# Altium PCB SiPM_Array_v3.1.PcbDoc
Units mil, origin at the board's own origin, x right, y up, seen from the top; angles counter-clockwise.
Board outline 6000 x 4000 mil, 2 copper layers (Top Layer, Bottom Layer); 7 components, 7 nets, 68 pads, 3 vias.
Unrouted connection lines stored in the file: 35.
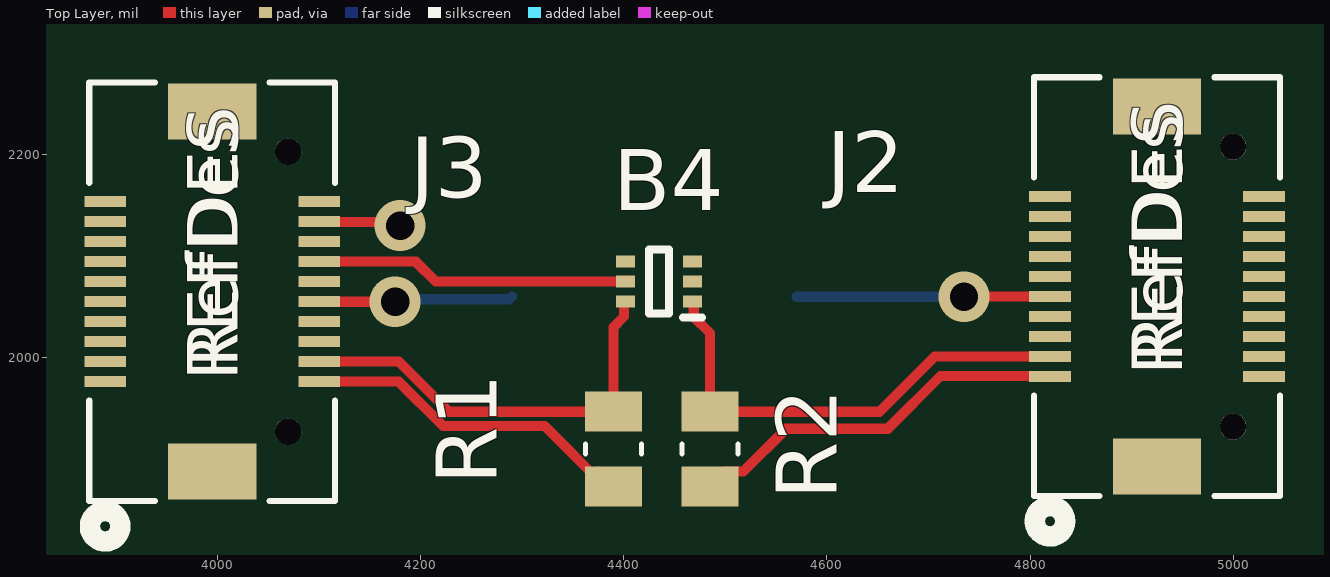
[diagram p0: Top Layer view]
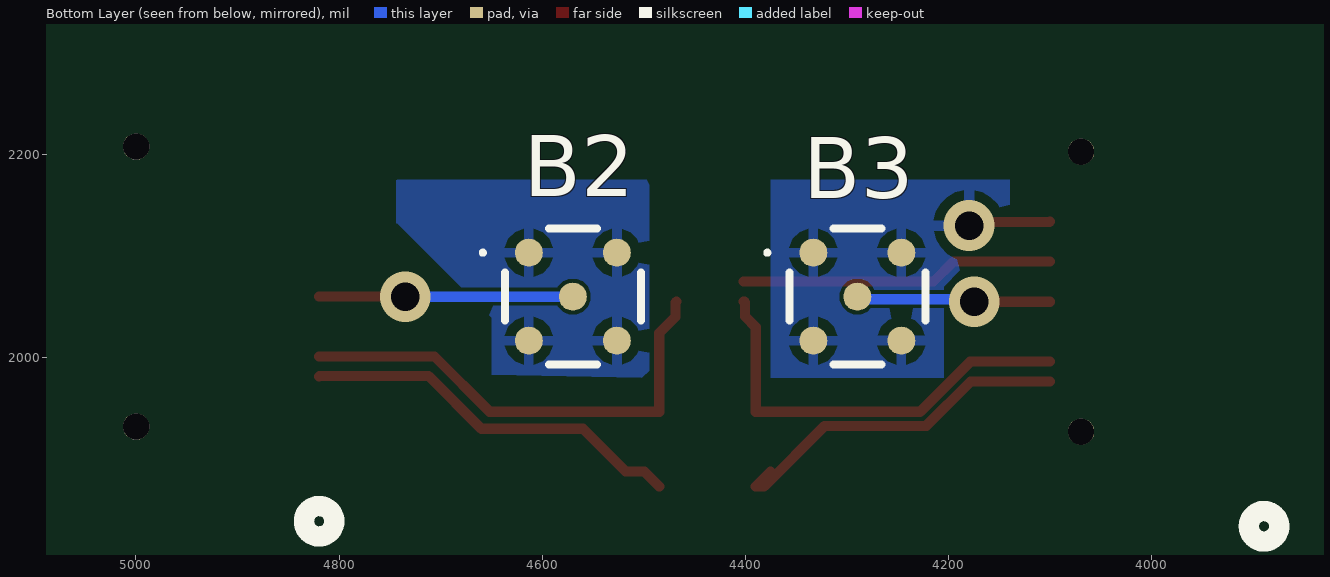
[diagram p1: Bottom Layer view, seen from below]

## Layer stack, top to bottom
Top Solder: solder mask 0.4, Solder Resist, Dk 3.5
Top Layer: signal copper 1.4
Dielectric 1: dielectric 12.6, FR-4, Dk 4.8
Bottom Layer: signal copper 1.4
Bottom Solder: solder mask 0.4, Solder Resist, Dk 3.5

## Board outline
1000,1000 7000,1000 7000,5000 1000,5000

## Design rules (kind name [scope] priority, off if disabled: settings)
Clearance [All] p1: gap=3.94 ignorepadtopadclearanceinfootprint=FALSE
PolygonConnect [All] p1: connectstyle=Relief reliefconductorwidth=10 reliefentries=4 polygonreliefangle="90 Angle" airgapwidth=10
RoutingVias [All] p1: holewidth=28 width=50 viastyle="Through Hole" minholewidth=28 minwidth=50 maxholewidth=28 maxwidth=50
SolderMaskExpansion [All] p1: expansion=4 istentingtop=FALSE
SupplyNets "Schematic Supply Nets_7" [InNet('SCL')] p1: voltage=0.000
SupplyNets "Schematic Supply Nets_6" [InNet('SDA')] p2: voltage=0.000
SupplyNets "Schematic Supply Nets_5" [InNet('VBR')] p3: voltage=0.000
SupplyNets "Schematic Supply Nets_4" [InNet('GND')] p4: voltage=0.000
SupplyNets "Schematic Supply Nets_3" [InNet('VAN1')] p5: voltage=0.000
SupplyNets "Schematic Supply Nets_2" [InNet('3V3')] p6: voltage=0.000
SupplyNets "Schematic Supply Nets_1" [InNet('VAN2')] p7: voltage=0.000
Width [All] p1: maxlimit=10 minlimit=10 preferedwidth=10
30 further rules are at their usual default settings.

## Components (designator, comment, footprint, x,y, rotation, side; value= is the part's Value field where it differs from the comment)
B2 "S14160-3050HS" S141603050HS 4570,2060 r180 bottom
B3 "S14160-3050HS" S141603050HS 4290,2060 r180 bottom
B4 "TMP112AQDRLRQ1" SOTFL50P160X60-6N 4435,2075 r180 top
J2 "DF17(3.0)-20DS-0.5V(57)" CONN_DF173.0-20DS-0.5V57_HIR 4925,2070 r90 top
J3 "DF17(3.0)-20DS-0.5V(57)" CONN_DF173.0-20DS-0.5V57_HIR 3995,2065 r90 top
R1 "CR0805-FX-2001ELF" RESC2012X60N 4390,1910 r90 top
R2 "CR0805-FX-2001ELF" RESC2012X60N 4485,1910 r90 top

## Footprints (in the part's own frame and the unit in brackets; to place one, negate y for a bottom-side part, rotate by r counter-clockwise, add the part's x,y. Pads: shape width x height; smd on the part's side, far side on the other; paste and mask are expansions set on the pad)
CONN_DF173.0-20DS-0.5V57_HIR [mil]
  rect 11x41 smd paste+0 mask+0: 1(-88.58,105.31) 2(-88.58,-105.31) 3(-68.9,105.31) 4(-68.9,-105.31) 5(-49.21,105.31) 6(-49.21,-105.31) 7(-29.53,105.31) 8(-29.53,-105.31) 9(-9.84,105.31) 10(-9.84,-105.31) 11(9.84,105.31) 12(9.84,-105.31) 13(29.53,105.31) 14(29.53,-105.31) 15(49.21,105.31) 16(49.21,-105.31) 17(68.9,105.31) 18(68.9,-105.31) 19(88.58,105.31) 20(88.58,-105.31)
  rect 55x87 smd paste-43.5 mask-43.5: 21(-177.17,0) 22(177.17,0)
  round 26 / inner round 60 / far side round 26 hole 26 unplated paste-99999 mask+0: 23(-137.8,-74.8) 24(137.8,-74.8)
  silkscreen extent -246,-121 206,121
RESC2012X60N [mm]
  rect 1x1.42 smd: 1(-0.935,0) 2(0.935,0)
  silkscreen extent -0.12,-0.7 0.12,0.7, body extent -1,-0.63 1,0.63, height 0.6
S141603050HS [mm]
  round 0.7 smd: A1(-1.1,1.1) A3(-1.1,-1.1) B2(0,0) C1(1.1,1.1) C3(1.1,-1.1)
  silkscreen extent -2.3,-1.7 1.7,1.7
SOTFL50P160X60-6N [mm]
  rect 0.475x0.3 smd: 1(-0.838,0.5) 2(-0.838,0) 3(-0.838,-0.5) 4(0.838,-0.5) 5(0.838,0) 6(0.838,0.5)
  silkscreen extent -1.07,-0.8 0.25,0.9

## Part data
B2 B3: "The S14160 series achieve higher PDE (photon detection efficiency) and lower operation voltage than other MPPC to adapt for PET and radiation monitor application.-Higher PDE: 50% at p, Vop=VBR + 2.7 V", Manufacturer_Name=Hamamatsu, Datasheet Link=https://www.hamamatsu.com/content/dam/hamamatsu-photonics/sites/documents/99_SALES_LIBRARY/ssd/s14160_s14161_series_kapd1064e.pdf, Geometry.Height=1.55mm, Manufacturer_Part_Number=S14160-3050HS
B4: "Automotive Grade, 1.4V-Capable +/-0.5C Temperature Sensor with Alert Function and I2C/SMBus", Manufacturer_Name="Texas Instruments", Mouser Part Number=595-TMP112AQDRLRQ1, Arrow Part Number=TMP112AQDRLRQ1, Arrow Price/Stock=https://www.arrow.com/en/products/tmp112aqdrlrq1/texas-instruments?utm_currency=USD&region=nac, Datasheet Link=http://www.ti.com/lit/gpn/tmp112-q1, Geometry.Height=0.6mm, Manufacturer_Part_Number=TMP112AQDRLRQ1, Mouser Price/Stock=https://www.mouser.co.uk/ProductDetail/Texas-Instruments/TMP112AQDRLRQ1?qs=asCBFxFfL1Q5YmJCm%252BGnCQ%3D%3D
J2 J3: library part DF173.0-20DS-0.5V57, "Description", Manufacturer_Name=Hirose, Copyright="Copyright (C) 2025 Ultra Librarian. All rights reserved.", Manufacturer_Part_Number=DF17(3.0)-20DS-0.5V(57), RefDes=RefDes, Type=Type
R1 R2: "Res 0805 2k 1% 125mW", Package="0805 Bourns", Check_prices=https://www.snapeda.com/parts/CR0805-FX-2001ELF/Bourns/view-part/?ref=eda, MF=Bourns, MP=CR0805-FX-2001ELF, SnapEDA_Link=https://www.snapeda.com/parts/CR0805-FX-2001ELF/Bourns/view-part/?ref=snap

## Via types
v1: diameter 50, hole 28, Top Layer to Bottom Layer, 3 vias

## Nets (pads, with @x,y where several pads share a name; then routed paths per layer and width w, separated by ;. In a path a pad name is that pad's centre, name@x,y a point inside that pad or via, vN(x,y) a via of type N, cw(c..) or ccw(c..) an arc to the next point about the centre after c; other vN are vias at no path point)
3V3: B4.5 J2.1 J2.7 J2.13 J3.2 J3.8 J3.14 R1.1 R2.1 | length 1042.9
  Top Layer w10: J3.2 4178.58,1976.42 4222.13,1932.87 4322.05,1932.87 4381.73,1873.19 R1.1 R1.1@4375.31,1887.87 ; J3.14 4195.47,2094.53 4215,2075 B4.5 ; R2.1 4499.69,1887.87 4517.87,1887.87 4560,1930 4660,1930 4711.92,1981.92 4819.19,1981.92 J2.1
GND: B4.2 B4.3 B4.4 J2.2 J2.4 J2.6 J2.8 J2.10 J2.12 J2.14 J2.15 J2.16 J2.17 J2.19 J2.20 J3.1 J3.3 J3.5 J3.7 J3.9 J3.11 J3.15 J3.17 J3.19 J3.20
SCL: B4.1 J2.3 R2.2 | length 472.8
  Top Layer w10: B4.1 4468.1,2055.32 4469,2054.41 4469,2040.27 4485,2024.27 R2.2 4651.81,1946.81 4706.1,2001.1 J2.3
SDA: B4.6 J2.11 J3.4 R1.2 | length 424
  Top Layer w10: J3.4 4178.9,1996.1 4228.19,1946.81 R1.2 4390,2030 4400.43,2040.43 4400.43,2054.41 4401.33,2055.32 B4.6
VAN1: B2.B2 J2.9 | length 249.8
  Top Layer w10: v1(4735,2060) 4735.08,2060.08 4819.61,2060.08 J2.9
  Bottom Layer w10: B2.B2 v1(4735,2060)
VAN2: B3.B2 J3.10 | length 208.9
  Top Layer w10: J3.10 4100.47,2055 v1(4175,2055) 4180,2050 v1@4180,2040
  Bottom Layer w10: v1(4175,2055) 4177.5,2057.5 4287.5,2057.5 B3.B2
VBR: B2.A1 B2.A3 B2.C1 B2.C3 B3.A1 B3.A3 B3.C1 B3.C3 J2.18 J3.6 J3.13 J3.16 J3.18 | length 92.1
  Top Layer w10: J3.18 4100.81,2133.4 4176.6,2133.4 v1(4180,2130) v1@4169.18,2130
pads on no net: J2.5 J2.21 J2.22 J2.23 J2.24 J3.12 J3.21 J3.22 J3.23 J3.24

## Polygon pours and split planes (outlines as drawn)
VBR on Bottom Layer "VBR_L02_P001" (solid, pour order 1): 4495,1980 4495,2170 4490,2175 4742.96,2175 4743.58,2174.38 4743.58,2132.29 4742.95,2132.29 4649.97,2039.32 4649.97,1983.28
VBR on Bottom Layer "VBR_L02_P000" (solid, pour order 0): 4140,2175 4375,2175 4375,1980 4205,1980 4205,2070 4140,2135

## Text inside footprints (layer, text, board x,y; h text height)
J2: Top Overlay "REFDES" at 4950,1982.5 h50 r90; Top Overlay "RefDes" at 4950,1995 h50 r90; Mechanical 13 "RefDes2" at 4950,1982.5 h50 r90
J3: Top Overlay "REFDES" at 4020,1977.5 h50 r90; Top Overlay "RefDes" at 4020,1990 h50 r90; Mechanical 13 "RefDes2" at 4020,1977.5 h50 r90